# EAGLE board WB-test-V1 (EAGLE 9.6.2)

Size 160 x 100 mm. Coordinates in mm from the lower left corner, seen from the top.
Outline: 0,0 160,0 160,100 0,100 0,0
Copper layers (1*16): Top 0.035mm / dielectric 1.5mm / Bottom 0.035mm
Design rules "default": minimum track width 6mil, minimum drill 0.35mm, track to track 6mil, track to pad 6mil, pad to pad 6mil, via to via 6mil, smd to smd 6mil, copper to edge 40mil, drill to drill 6mil, minimum pad ring 10mil, minimum via ring 8mil, stop-mask expansion 4mil, vias tented up to drill 0mil, thermal gap 10mil

## Footprints (pad centres in the part's own frame; a part is rotated, then mirrored left to right if it is on the bottom)
SOIC127P780X200-14N = smd 1.825 x 0.7: 1 -3.562,3.81; 2 -3.562,2.54; 3 -3.562,1.27; 4 -3.562,0; 5 -3.562,-1.27; 6 -3.562,-2.54; 7 -3.562,-3.81; 8 3.562,-3.81; 9 3.562,-2.54; 10 3.562,-1.27; 11 3.562,0; 12 3.562,1.27; 13 3.562,2.54; 14 3.562,3.81
0402 = smd 0.85 x 0.9: 1 -0.58,0; 2 0.58,0
ARDUCAM_MINI = drill 1.016 pad 1.88: CS 21.33,2.55; GND 11.17,2.55; MISO 16.25,2.55; MOSI 18.79,2.55; SCK 13.71,2.55; SCL 3.55,2.55; SDA 6.09,2.55; VCC 8.63,2.55 | hole 3: 22.25,31.75; 2.25,31.75
JST-2-SMD = smd 1 x 4.6: 1 -1,-3.7; 2 1,-3.7 | smd 1.6 x 3.4: NC1 -3.4,1.5; NC2 3.4,1.5
1X08 = drill 1.016 pad 1.88: 1 0,0; 2 2.54,0; 3 5.08,0; 4 7.62,0; 5 10.16,0; 6 12.7,0; 7 15.24,0; 8 17.78,0
MOUDLE14P-2.54-21X17.8MM = smd 2.75 x 2: 1 0.835,18.12; 2 0.835,15.58; 3 0.835,13.04; 4 0.835,10.5; 5 0.835,7.96; 6 0.835,5.42; 7 0.835,2.88; 8 17,2.88; 9 17,5.42; 10 17,7.96; 11 17,10.5; 12 17,13.04; 13 17,15.58; 14 17,18.12
SDREAD = smd 0.8 x 1.5: CS 0.84,-2.79; GND -3.56,-3.39; MISO -4.66,-3.19; MOSI -0.26,-3.19; SCK -2.46,-3.19; VDD -1.36,-3.39; X1 1.94,-3.19; X2 -5.76,-3.19 | smd 1.4 x 1.9: P$1 6.55,-7.04; P$2 -6.6,-6.04 | smd 1.8 x 1.4: P$3 -4.95,7.11; P$4 0.75,7.11
BME280 = smd 0.35 x 0.5: 1 0.975,-1.025; 2 0.325,-1.025; 3 -0.325,-1.025; 4 -0.975,-1.025; 5 -0.975,1.025; 6 -0.325,1.025; 7 0.325,1.025; 8 0.975,1.025

## Placement (x,y rotation side)
BUS_CONT  [SOIC127P780X200-14N]  -19.05,66.04 0 top  (outside the outline)
C1  0.1uF  [0402]  -36.83,73.66 0 top  (outside the outline)
CAM  ARDUCAM_MINI  [ARDUCAM_MINI]  -38.1,1.27 0 top  (outside the outline)
POWER  [JST-2-SMD]  -29.21,66.04 0 top  (outside the outline)
RADIO  [1X08]  11.43,88.9 0 top
SAMD21  [MOUDLE14P-2.54-21X17.8MM]  -31.75,36.83 0 top  (outside the outline)
SD  SD_READER  [SDREAD]  -40.64,44.45 0 top  (outside the outline)
SENSOR  BME280  [BME280]  -35.56,62.23 0 top  (outside the outline)

## Library data of the parts
BUS_CONT = SN74LS125ANSR; DESCRIPTION: Quadruple Bus Buffers With 3-State Outputs; HEIGHT: 2mm; MANUFACTURER_NAME: Texas Instruments; MANUFACTURER_PART_NUMBER: SN74LS125ANSR; MOUSER_PART_NUMBER: 595-SN74LS125ANSR; MOUSER_PRICE-STOCK: https://www.mouser.co.uk/ProductDetail/Texas-Instruments/SN74LS125ANSR?qs=SL3LIuy2dWyvKnv7tFWEOw%3D%3D
C1 = SparkFun-Capacitors; PROD_ID: CAP-12416
CAM SD = project-library
POWER = SparkFun-Connectors; PROD_ID: CONN-11443; SF_ID: PRT-08612
RADIO = SparkFun-Connectors; PROD_ID: CONN-08438
SAMD21 = Seeeduino-XIAO-footprint-eagle
SENSOR = bosch-bme280

## Nets
3V3: BUS_CONT.14 C1.2 RADIO.8 SAMD21.12 SD.VDD SENSOR.6 SENSOR.8
5V: POWER.2 RADIO.2 SAMD21.14
CS_BME: SAMD21.4 SENSOR.2
CS_CAM: CAM.CS SAMD21.3
CS_RAD: BUS_CONT.10 BUS_CONT.13 RADIO.3 SAMD21.7
CS_SD: BUS_CONT.1 BUS_CONT.4 SAMD21.8 SD.CS
GND: BUS_CONT.7 C1.1 POWER.1 RADIO.1 RADIO.7 SAMD21.13 SENSOR.1 SENSOR.7
MISO: BUS_CONT.3 BUS_CONT.11 CAM.MISO SAMD21.10 SENSOR.5
MISO_RAD: BUS_CONT.12 RADIO.4
MISO_SD: BUS_CONT.2 SD.MISO
MOSI: BUS_CONT.5 BUS_CONT.9 CAM.MOSI SAMD21.11 SENSOR.3
MOSI_RAD: BUS_CONT.8 RADIO.5
MOSI_SD: BUS_CONT.6 SD.MOSI
N$3: CAM.GND
N$4: CAM.VCC
N$5: CAM.SDA SAMD21.5
N$6: CAM.SCL SAMD21.6
SCK: CAM.SCK RADIO.6 SAMD21.9 SD.SCK SENSOR.4

## Tracks (layer width: path | path; a pad name or v marks a point on that pad's centre or on a via)
3V3  (6 unrouted)
5V  (2 unrouted)
CS_BME  (1 unrouted)
CS_CAM  (1 unrouted)
CS_RAD  (3 unrouted)
CS_SD  (3 unrouted)
GND  (7 unrouted)
MISO  (4 unrouted)
MISO_RAD  (1 unrouted)
MISO_SD  (1 unrouted)
MOSI  (4 unrouted)
MOSI_RAD  (1 unrouted)
MOSI_SD  (1 unrouted)
N$5  (1 unrouted)
N$6  (1 unrouted)
SCK  (4 unrouted)